# Altium PCB DUTBoard_NO_CAPS.PcbDoc (part 2 of 5)
Units mil, origin at the board's own origin, x right, y up, seen from the top; angles counter-clockwise.
Board outline 5475 x 5475 mil, 4 copper layers (Top Layer, Mid-Layer 1, Mid-Layer 2, Bottom Layer); 57 components, 471 nets, 1641 pads, 1070 vias.
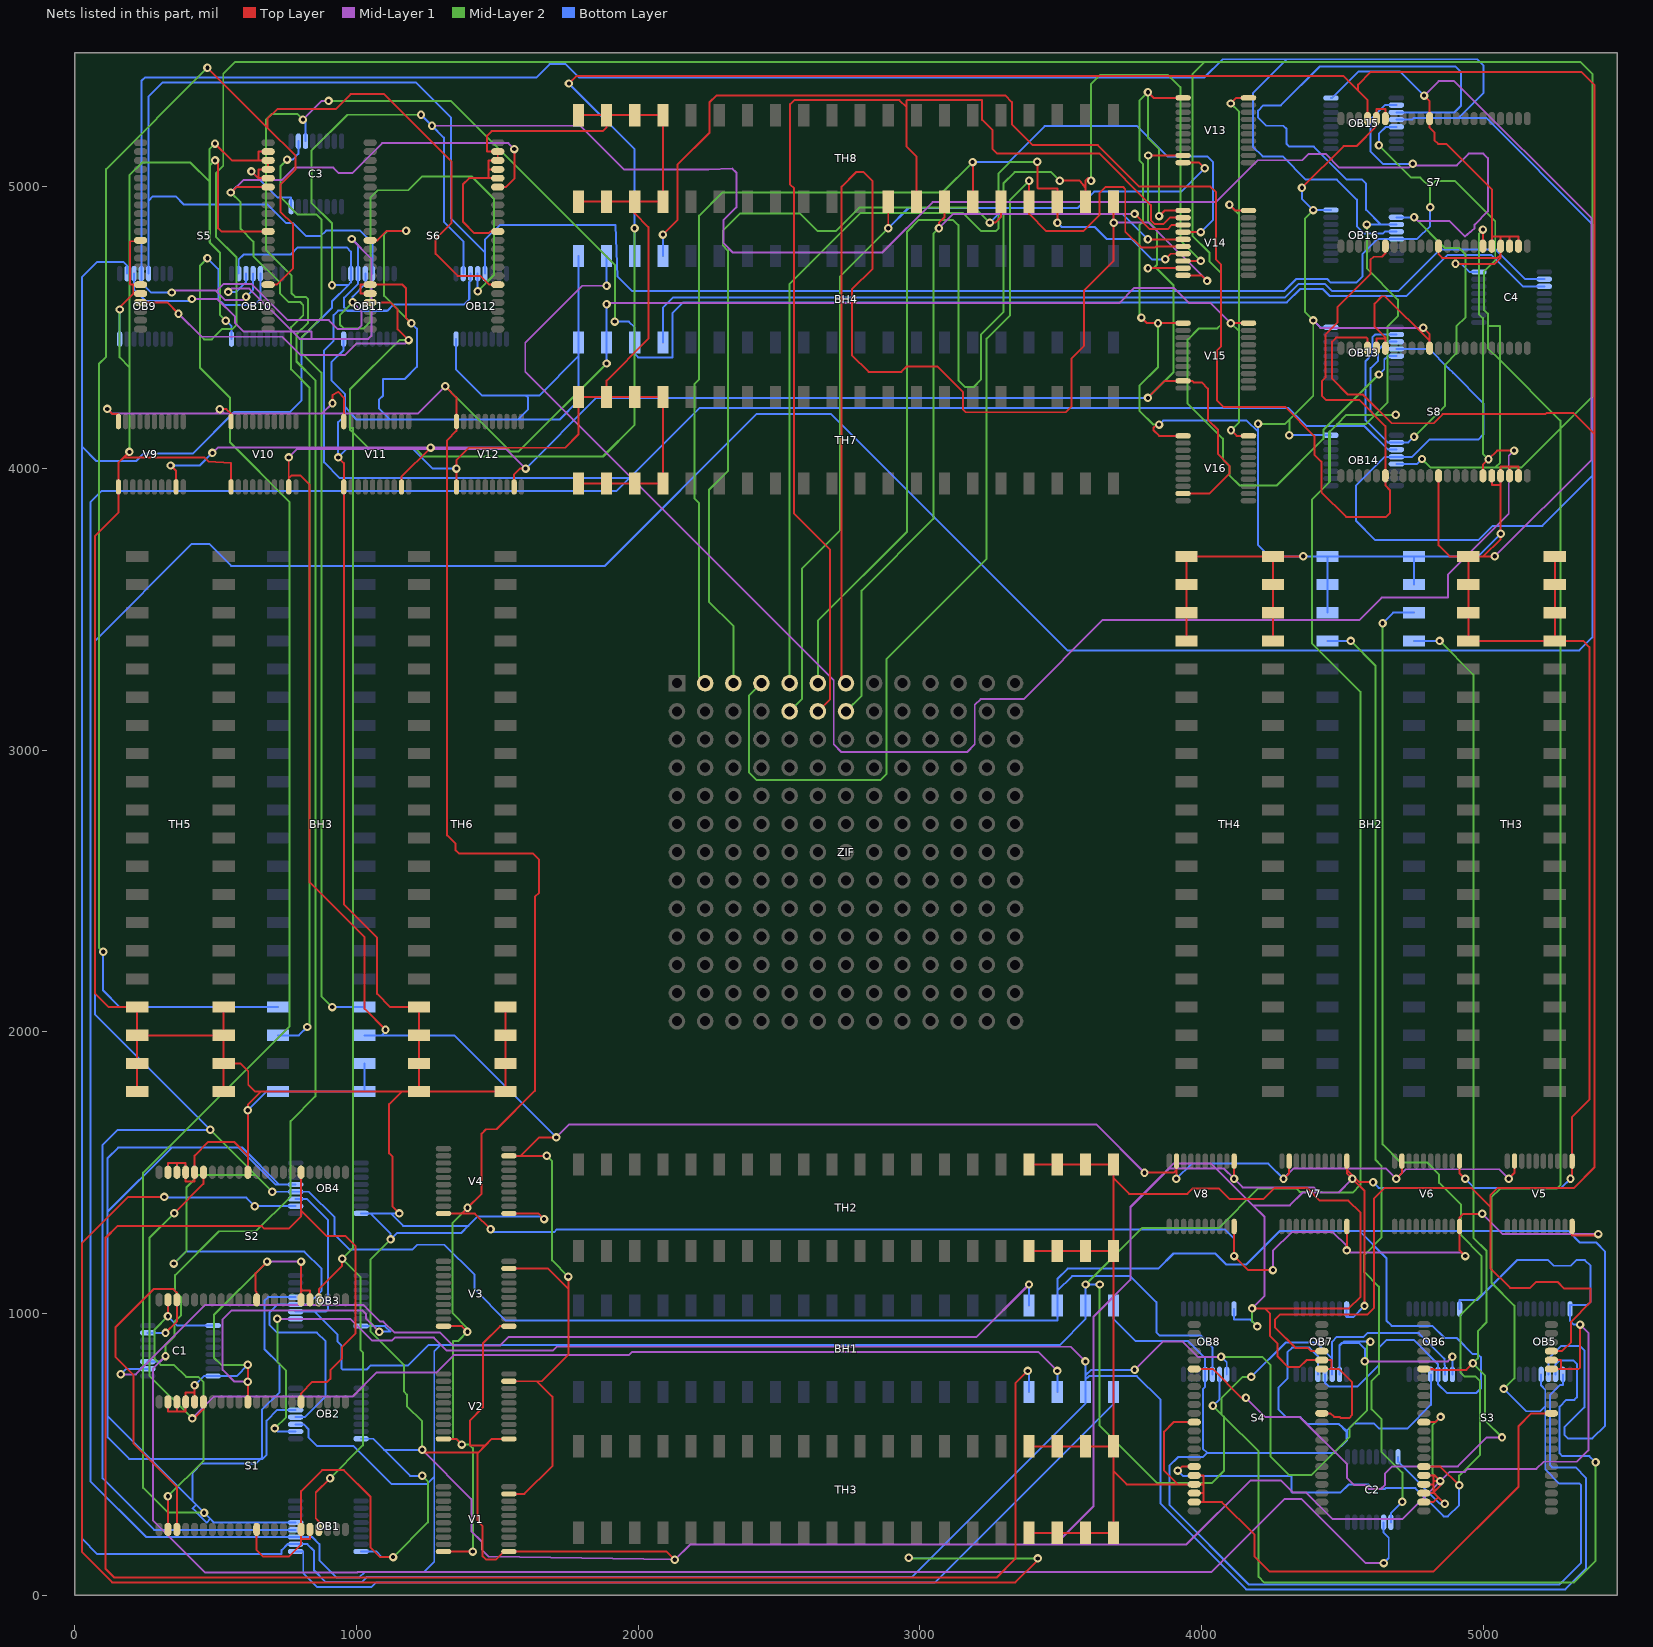
[diagram p4: the nets of this part, all layers, seen from the top]

## Via types
v1: diameter 30, hole 15, Top Layer to Bottom Layer, 1070 vias

## Nets (pads, with @x,y where several pads share a name; then routed paths per layer and width w, separated by ;. In a path a pad name is that pad's centre, name@x,y a point inside that pad or via, vN(x,y) a via of type N, cw(c..) or ccw(c..) an arc to the next point about the centre after c; other vN are vias at no path point) (continued)
ADDRD_B10: C1.ADDR10 S1.ADDR10 S2.ADDR10 | length 1309.8
  Top Layer w7: v1(322,931) 362.28,971.28 S2.ADDR10@362.28,1048.62 362.28,1073.72 349,1087 281,1087 144.36,950.36 144.36,846.2 209,781.56 209,538.28 362.28,385 S1.ADDR10@362.28,233.62
  Bottom Layer w7: C1.ADDR10@258.86,931.48 321.52,931.48 v1(322,931)
ADDRD_B11: C1.ADDR11 S1.ADDR11 S2.ADDR11 | length 1185.7
  Top Layer w7: S1.ADDR11@330.79,233.62 v1(330.79,351) ; v1(330.79,990) S2.ADDR11@330.79,1048.62
  Mid-Layer 2 w7: v1(330.79,351) 457,477.21 457,755.65 437.65,775 395,775 352.03,817.97 305.03,817.97 283,840 283,942.21 v1(330.79,990)
  Bottom Layer w7: v1(330.79,990) 363.72,957.07 C1.ADDR11@491.14,957.07
CLK_1: BH4.17 C4.~CLK | length 3401.8
  Bottom Layer w7: BH4.17@2087.5,4446.46 2087.5,4570.43 2124.07,4607 4296,4607 4343,4654 4438,4654 4463,4629 4697.5,4629 4844.5,4776 5044,4776 5148.52,4671.48 C4.~CLK@5216.14,4671.48
CLK_2: BH3.17 C3.~CLK | length 3399.8
  Mid-Layer 2 w7: v1(753.52,5096) 730.61,5073.09 730.61,4961.61 791.65,4900.58 858.34,4900.58 874.96,4883.96 874.96,4534.97 804,4464.01 804,4410.5 874.96,4339.54 874.96,2126.54 v1(914,2087.5)
  Bottom Layer w7: v1(753.52,5096) 773.52,5096 793.52,5116 C3.~CLK@793.52,5161.14 ; v1(914,2087.5) BH3.17@1028.54,2087.5
CLK_3: BH2.17 C2.~CLK | length 3376.2
  Mid-Layer 2 w7: v1(4529.5,3387.5) 4617,3300 4617,1545 4638,1524 4638,1268.95 4576.38,1207.33 4576.38,1147.69 4629,1095.07 4629,786 4603.5,760.5 4603.5,659.5 4639,624 4639,508 4712,435 v1(4712,332)
  Bottom Layer w7: BH2.17@4446.46,3387.5 v1(4529.5,3387.5) ; C2.~CLK@4671.48,258.86 4671.48,291.48 v1(4712,332)
CLK_4: BH1.17 C1.~CLK | length 3653.2
  Mid-Layer 1 w7: v1(163.43,784) 216.5,784 463.5,1031 1024.53,1031 1084.03,971.5 1095.5,971.5 1135.07,931.93 1296.48,931.93 1341.41,887 1510.5,887 1540.5,917 3201,917 v1(3387,1103)
  Bottom Layer w7: v1(163.43,784) 182.96,803.52 C1.~CLK@258.86,803.52 ; v1(3387,1103) 3387.5,1102.5 BH1.17@3387.5,1028.54
CLR_COUNTER_W_U_COUNTER_WRP1: BH4.18 C1.CLR C2.CLR C3.CLR C4.CLR | length 15835.3
  Mid-Layer 1 w7: v1(322,849) 278,805 278,265 463,80 1002.14,80 1005.14,83 4035.5,83 4294.86,342.36 4354.02,342.36 4582.39,114 v1(4645.89,114) ; v1(809.93,5238) 875.93,5304 v1(901,5304)
  Mid-Layer 2 w7: v1(322,849) 322,887 354.05,919.05 354.05,970.5 376.22,992.67 376.22,1059.22 356,1079.45 356,1136 512,1292 643.16,1292 766,1414.84 766,1683.08 854,1771.08 854,4312.1 787,4379.1 787,4476.07 828,4517.07 828,4600.5 820,4608.5 782,4608.5 770,4620.5 770,4683.7 678,4775.7 678,5236.5 700,5258.5 789.43,5258.5 v1(809.93,5238) ; v1(901,5304) 1335,5304 1917,4722 v1(1917,4521)
  Bottom Layer w7: C1.CLR@258.86,829.11 302.11,829.11 v1(322,849) ; v1(809.93,5238) 819.11,5228.81 C3.CLR@819.11,5161.14 ; v1(1917,4521) 1966.5,4521 1987.5,4500 BH4.18@1987.5,4446.46 1987.5,4406.08 2000,4393.58 2120.69,4393.58 2121,4393.9 2121,4549.82 2160.18,4589 4302.5,4589 4350,4636.5 4430,4636.5 4455.5,4611 4726.5,4611 4873.5,4758 5028,4758 5140.11,4645.89 C4.CLR@5216.14,4645.89 ; v1(4645.89,114) 4664,132.11 4664,204 4645.89,222.11 C2.CLR@4645.89,258.86
EN: BH4.19 V1.EN V2.EN V3.EN V4.EN V5.EN V6.EN V7.EN V8.EN V9.EN V10.EN V11.EN V12.EN V13.EN V14.EN V15.EN V16.EN | length 16402
  Top Layer w7: v1(115,4211) 133.15,4192.85 154.84,4192.85 V9.EN@154.84,4166.14 ; v1(515,4210) 538.34,4210 554.84,4193.5 V10.EN@554.84,4166.14 ; v1(914.84,4231.02) 914.84,4260 934.84,4271.02 954.84,4251.02 V11.EN@954.84,4166.14 ; V1.EN@1308.86,154.84 v1(1413,154.84) ; V2.EN@1308.86,554.84 1353.74,554.84 v1(1373.74,534.84) ; V3.EN@1308.86,954.84 1373.74,954.84 v1(1393.74,934.84) ; V4.EN@1308.86,1354.84 1373.84,1354.84 ; v1(1315,4291) 1354.84,4251.16 V12.EN@1354.84,4166.14 1354.84,4132.92 1321.5,4099.58 1321.5,2697.5 1352,2667 1352,2644 1363,2633 1625,2633 1648,2610 1648,2494 1633,2479 1633,1790 1497,1654 1459.61,1654 1444,1638.39 1444,1425 v1(1394,1375) 1373.84,1354.84 ; v1(1476,1299) 1420.16,1354.84 1373.84,1354.84 ; v1(4098.42,4935.16) 4118.42,4915.16 V14.EN@4166.14,4915.16 ; v1(4103,5295) 4123.16,5315.16 V13.EN@4166.14,5315.16 ; v1(4103.58,4515.16) V15.EN@4166.14,4515.16 ; v1(4104,4135) 4123.84,4115.16 V16.EN@4166.14,4115.16 ; V8.EN@4115.16,1308.86 v1(4115.16,1203.98) 4165.14,1154 v1(4253,1154) ; v1(4515.16,1223.98) V7.EN@4515.16,1308.86 ; v1(4935.16,1204) 4915.16,1224 V6.EN@4915.16,1308.86 4915.16,1340 4929.16,1354 v1(4996.16,1354) ; V5.EN@5315.16,1308.86 5315.16,1276.84 5402.84,1276.84 v1(5408,1282)
  Mid-Layer 1 w7: v1(115,4211) 131,4195 500,4195 ; v1(914.84,4231.02) 878.82,4195 ; v1(1315,4291) 1219,4195 878.82,4195 ; v1(1887.5,4582) 1892,4586.5 3706.72,4586.5 3760.88,4640.66 3901.5,4640.66 3955.66,4586.5 4032.24,4586.5 v1(4103.58,4515.16) ; v1(4253,1154) 4253,1222 4320,1289 4466,1289 4515.16,1239.84 v1(4515.16,1223.98) 4522.14,1217 4922.16,1217 v1(4935.16,1204) ; v1(4996.16,1354) 5068.16,1282 v1(5408,1282) ; 500,4195 530,4195 ; 500,4195 v1(515,4210) 530,4195 ; 530,4195 878.82,4195
  Mid-Layer 2 w7: v1(1315,4291) 1547,4059 1574.5,4059 v1(1887.5,4372) ; v1(1394,1375) 1341,1322 1341,1001 1393.74,948.26 v1(1393.74,934.84) 1362,903.1 1342,903.1 1342,554.84 1353.74,554.84 v1(1373.74,534.84) 1400,534.84 1413,521.84 v1(1413,154.84) ; v1(4098.42,4935.16) 4133,4900.58 ; v1(4103,5295) 4133,5265 4133,4900.58 ; v1(4103.58,4515.16) 4133,4485.74 ; v1(4104,4135) 4133,4164 4133,4485.74 ; 4133,4485.74 4133,4900.58
  Bottom Layer w7: v1(1476,1299) 1486,1289 1701.5,1289 1711.5,1299 4081.17,1299 4115.16,1265.01 v1(4115.16,1203.98) ; v1(1887.5,4372) BH4.19@1887.5,4446.46 v1(1887.5,4582)
FPGA_Q: BH1.21 OB1.Q | length 3312.2
  Bottom Layer w7: OB1.Q@783.86,155.43 811,155.43 811,78.5 860.5,29 1053.14,29 1070.14,46 3053.5,46 3687.5,680 BH1.21@3687.5,721.46
FPGA_SHCP: BH1.19 OB1.SHCP OB2.SHCP OB3.SHCP OB4.SHCP OB5.SHCP OB6.SHCP OB7.SHCP OB8.SHCP OB9.SHCP OB10.SHCP OB11.SHCP OB12.SHCP OB13.SHCP OB14.SHCP OB15.SHCP OB16.SHCP | length 34880.7
  Mid-Layer 1 w7: v1(416,4601) 505.46,4601 569,4537.46 569,4515 599,4485 773,4485 ; v1(545,4626) 557,4638 620,4638 773,4485 ; v1(983,4814) 1053,4744 1053,4470.5 1042.04,4459.54 841,4459.54 ; 773,4485 798.46,4459.54 841,4459.54 ; 773,4485 841,4485 841,4459.54
  Mid-Layer 2 w7: v1(3588,1103) 3788,1303 4060,1303 4201,1444 4336,1444 4348,1432 ; v1(3638,1103) 3638,602 3841,399 4037,399 4079,441 4079,628.24 4079,633.61 ; v1(4040,672.61) 4070,642.61 ; v1(4176,775) 4145.78,775 4070,699.22 4070,642.61 ; v1(4586,4865) 4586,4709.5 4696.5,4599 4696.5,4540.53 4659,4503.03 4659,4233.19 4615.64,4189.82 ; v1(4688.5,4189.82) 4615.64,4189.82 ; v1(5398,472) 5398,123 5320,45 4222,45 4202,65 4202,510.61 4079,633.61 ; 4070,642.61 4079,633.61 ; 4348,1432 4349,1431 4424.5,1431 4426.5,1429 4429.5,1429 ; 4348,1432 4426.5,1432 4429.5,1429 ; 4392.5,3377.5 4392.5,3890.5 ; 4392.5,3377.5 4563.5,3206.5 ; 4392.5,3377.5 4392,3378 4392,3890 4392.5,3890.5 ; 4392.5,3890.5 4452,3950 ; 4429.5,1429 4536,1429 4563.5,1456.5 ; 4452,3950 4455.29,3953.29 4455.29,4131.85 4452,4128.56 ; 4452,3950 4452,4128.56 ; 4452,4128.56 4480.44,4157 ; 4480.44,4157 4582.81,4157 4615.64,4189.82 ; 4480.44,4157 4513.26,4189.82 4615.64,4189.82 ; 4563.5,1456.5 4564,1457 4564,3206 4563.5,3206.5 ; 4563.5,1456.5 4563.5,3206.5
  Bottom Layer w7: OB9.SHCP@210.61,4691.14 210.61,4634.39 251,4594 409,4594 v1(416,4601) ; v1(545,4626) 573.61,4626 607.61,4660 OB10.SHCP@607.61,4691.14 ; OB2.SHCP@783.86,606.61 812.39,606.61 829,590 829,560 860,529 990,529 1124,395 1251,395 1276,420 ; OB3.SHCP@783.86,1006.61 851,1006.61 ; OB4.SHCP@783.86,1406.61 823.39,1406.61 898.93,1331.07 898.93,1015.2 890.34,1006.61 851,1006.61 ; v1(983,4814) 1005.61,4791.39 OB11.SHCP@1005.61,4691.14 1005.61,4655.61 956,4606 956,4571 967,4560 ; OB12.SHCP@1404.61,4691.14 1404.61,4665.61 1401,4662 ; v1(3638,1103) v1(3588,1103) ; v1(4040,672.61) 4063.39,696 OB8.SHCP@4063.39,783.86 ; v1(4176,775) 4298,897 4406.39,897 4463.39,840 ; OB7.SHCP@4463.39,783.86 4463.39,840 ; v1(4586,4865) 4586.39,4865.39 4635.61,4865.39 ; v1(4688.5,4189.82) 4613.18,4189.82 4600,4203 4600,4355.5 4626,4381.5 4626,4420 4655.39,4449.39 OB13.SHCP@4691.14,4449.39 ; OB14.SHCP@4691.14,4066.39 4661.55,4066.39 4577.93,4150 4373,4150 4309,4214 2217,4214 1968,3965 ; OB16.SHCP@4691.14,4865.39 4635.61,4865.39 ; OB15.SHCP@4691.14,5263.39 4897.37,5263.39 4920,5286.01 4920,5407.5 4900.5,5427 4420,5427 4281,5288 4218.5,5288 4200,5269.5 4200,5244.71 4228.71,5216 4289.71,5216 4301,5204.71 4301,5152 4311,5142 4398,5142 4515,5025 4569.5,5025 4584,5010.5 4584,4917 4635.61,4865.39 ; OB6.SHCP@4864.39,783.86 4864.39,815.01 4861.48,817.92 4861.48,839.52 4771,930 4588,930 4575,917 4480,917 4463.39,900.39 4463.39,840 ; OB5.SHCP@5256.39,783.86 5256.39,820 5269.39,833 5320,833 5332,821 5332,702.66 5322.98,693.63 5294.63,693.63 5270.52,669.52 5270.52,503.48 5280,494 5376,494 v1(5398,472) ; 851,1006.61 932,925.61 932,901.12 947.5,885.62 947.5,804 950.5,801 1035.5,801 1050.5,816 1183,816 1255,888 1298,888 ; 967,4560 968,4559 1109,4559 1110,4560 ; 967,4560 1110,4560 ; 967,4560 935.11,4560 918.5,4543.39 918.5,4452.5 885,4419 885,4021 941,3965 1968,3965 ; 1110,4560 1131,4581 1381,4581 1400,4600 ; 1276,420 1276,866 1298,888 ; 1276,420 1276,119 1239,82 1029,82 1010.5,63.5 928.14,63.5 868,123.63 868,181 842.39,206.61 OB1.SHCP@783.86,206.61 253.39,206.61 55,405 55,3880 95,3920 1923,3920 1968,3965 ; 1298,888 3495.5,888 3587.5,980 BH1.19@3587.5,1028.54 ; 1400,4600 1400,4661 1401,4662 ; 1400,4600 1401,4601 1401,4662 ; BH1.19@3587.5,1028.54 3587.5,1102.5 v1(3588,1103) ; BH1.19@3587.5,1028.54 v1(3588,1103)
FPGA_STCP: BH1.18 OB1.STCP OB2.STCP OB3.STCP OB4.STCP OB5.STCP OB6.STCP OB7.STCP OB8.STCP OB9.STCP OB10.STCP OB11.STCP OB12.STCP OB13.STCP OB14.STCP OB15.STCP OB16.STCP | length 36095.1
  Mid-Layer 1 w7: v1(344,4624) v1@351,4631 ; v1(608,4609.13) 595.86,4597 533.5,4597 501.75,4628.75 ; v1(986,4589.13) 1018.5,4556.63 1018.5,4507.75 1005.04,4494.29 933.71,4494.29 902.21,4525.79 756.25,4525.79 627.04,4655 528,4655 501.75,4628.75 ; v1@351,4631 501.75,4628.75 ; v1@351,4631 499.5,4631 501.75,4628.75
  Mid-Layer 2 w7: v1(351,1177) 397,1223 397,1449 440,1492 641,1492 ; v1(481,1652) 641,1492 ; v1(701,1432) 641,1492 ; v1(986,4589.13) 941,4544.13 941,4510.5 954.5,4497 1026,4497 1049,4520 1049,4960 1076,4987 1184.22,4987 1232.22,5035 1410,5035 1488,4957 1488,4686.2 v1(1430.2,4628.41)
  Bottom Layer w7: v1(344,4624) 272,4624 236.2,4659.8 OB9.STCP@236.2,4691.14 236.2,5374.85 249.36,5388 1639,5388 1685.5,5434.5 1742.5,5434.5 1789,5388 4010,5388 4074,5452 4302,5452 ; v1(351,1177) 394,1220 815,1220 876,1159 876,1081 827.2,1032.2 OB3.STCP@783.86,1032.2 720,1032.2 690.48,1002.68 690.48,960 718.48,932 859.5,932 890.23,901.27 890.23,706.73 815.7,632.2 OB2.STCP@783.86,632.2 ; v1(608,4609.13) 633.2,4634.34 OB10.STCP@633.2,4691.14 ; v1(701,1432) 701.2,1432.2 OB4.STCP@783.86,1432.2 830.79,1432.2 922,1340.99 922,1280 974.5,1227.5 1199.5,1227.5 1216,1244 1312,1244 1419,1137 1419,1086 1530,975 3487.5,975 BH1.18@3487.5,1028.54 3487.5,1080 ; OB1.STCP@783.86,232.2 281.8,232.2 99,415 99,1599 152,1652 v1(481,1652) 72,2061 72,3388 416,3732 477,3732 555,3654 1882,3654 2421,4193 2684,4193 3523,3354 5341,3354 5387,3400 5387,3974 ; v1(986,4589.13) 986,4609.13 1031.2,4654.34 OB11.STCP@1031.2,4691.14 ; v1(1430.2,4628.41) OB12.STCP@1430.2,4691.14 ; OB8.STCP@4037.8,783.86 4037.8,880 3995.8,922 3850,922 3839,933 3839,1040 3746,1133 3540.5,1133 3487.5,1080 ; OB7.STCP@4437.8,783.86 4437.8,754.2 4451,741 4554,741 4629,816 4629,879 4656.25,906.25 4752.55,906.25 4838.8,820 OB6.STCP@4838.8,783.86 4838.8,749.2 4870,718 4975.5,718 4991.34,733.84 4991.34,844.79 4980,856.13 4962.87,856.13 4906,913 4862,913 4819,956 4674,956 4656,974 4656,1196 4559,1293 ; OB13.STCP@4691.14,4423.8 4807.2,4423.8 4875.5,4355.5 4875.5,4355.19 4892.19,4338.5 4892.5,4338.5 5000,4231 5000,4120.5 4981.5,4102 4808.2,4102 4747,4040.8 OB14.STCP@4691.14,4040.8 4649.41,4040.8 4548,3939.39 4548,3813 4615,3746 4982.72,3746 5032.72,3796 5209,3796 5387,3974 ; OB16.STCP@4691.14,4839.8 4650,4839.8 4644.2,4834 4576,4834 4551,4859 4551,4954 4480,5025 4370,5025 4288,5107 4216,5107 4182,5141 4182,5332 4302,5452 ; OB15.STCP@4691.14,5237.8 4746.8,5237.8 4753,5244 4912.49,5244 ; OB5.STCP@5230.8,783.86 5230.8,840 5274.8,884 5343,884 5358,869 5358,667 5287.52,596.52 5287.52,568.98 5299.5,557 5387,557 5432,602 5432,1220 5400,1252 5342,1252 5301,1293 4559,1293 ; 3487.5,1080 3487.5,1122.5 3524,1159 3846,1159 3900,1213 4048,1213 4087,1174 4159,1174 4278,1293 4559,1293 ; 4302,5452 4978,5452 5000,5430 5000,5331.51 4912.49,5244 ; 4912.49,5244 5010,5244 5387,4867 5387,3974
FPGA_~CS1: BH4.24 S7.~CS S8.~CS | length 5483.1
  Top Layer w7: v1(2087.5,4829.5) 2139,4881 2139,5077 2253,5191 2253,5299 2278,5324 3302,5324 3326,5300 3326,5221 3400,5147 3631.54,5147 3778.54,5000 4031,5000 4050,4981 4050,4742 4069,4723 4069,4433 4054,4418 4054,4241 4077,4218 4296,4218 4400,4114 4400,4048.8 4424.8,4024 4424.8,3915.7 4512.5,3828 4655,3828 4668,3841 4668,3923 4651.77,3939.23 S8.~CS@4651.77,3973.62 4651.77,4149.98 4558.75,4243 4440.81,4243 4427,4256.81 4427,4309.5 4439,4321.5 4439,4474.59 4481.5,4517.09 4481.5,4571.5 4599,4689 4599,4740 4610,4751 4640,4751 4651.77,4762.77 S7.~CS@4651.77,4788.62
  Bottom Layer w7: BH4.24@2087.5,4753.54 v1(2087.5,4829.5)
FPGA_~CS2: BH3.24 S5.~CS S6.~CS | length 6517.1
  Top Layer w7: v1(471,5422) 684,5209 ; S5.~CS@686.38,4651.77 716.34,4651.77 775,4710.43 775,4866 730,4911 730,5007 784,5061 784,5109 684,5209 ; S6.~CS@1501.38,4651.77 1471.27,4651.77 1440.04,4683 1359,4683 1281,4761 1281,4814.91 1336.5,4870.41 1336.5,5089.5 1098,5328 979,5328 926,5275 719,5275 684,5240 684,5209
  Mid-Layer 2 w7: v1(101,2284) 86,2299 86,4371 111,4396 111,5062 v1(471,5422)
  Bottom Layer w7: v1(101,2284) 101,2146.5 160,2087.5 BH3.24@721.46,2087.5
FPGA_~CS3: BH2.24 S3.~CS S4.~CS | length 4669.3
  Top Layer w7: S4.~CS@3973.62,803.23 4038.7,803.23 4140.93,701 v1(4157,701) ; v1(4962.84,823.23) 4939.61,800 4825.47,800 ; 4825.47,800 S3.~CS@4788.62,803.23 4822.24,803.23 4825.47,800
  Mid-Layer 1 w7: v1(4157,701) 4226,632 4349,632 4516,465 4516,416 4540,392 4578,392 4593,377 4636.5,377 4650,390.5 4650,430.96 4676.04,457 4909.47,457 5012.47,560 v1(5066,560)
  Mid-Layer 2 w7: v1(4844.5,3387.5) 4964,3268 4964,1269.35 5010.93,1222.42 5010.93,968.24 4980,937.31 4980,840.39 v1(4962.84,823.23) 5005.42,780.65 5005.42,620.58 v1(5066,560)
  Bottom Layer w7: BH2.24@4753.54,3387.5 v1(4844.5,3387.5)
FPGA_~CS4: BH1.24 S1.~CS S2.~CS | length 7004.8
  Top Layer w7: S1.~CS@803.23,686.38 803.23,716.89 843.43,757.09 895.86,757.09 907,768.23 907,798.37 948,839.37 948,880.5 996.29,928.79 996.29,1240 960.77,1275.52 893.09,1275.52 803.23,1365.39 ; S2.~CS@803.23,1501.38 803.23,1365.39 ; v1(3383,796) 3339,752 3339,129 3273,63 140,63 109,94 109,1268 151,1310 664.24,1310 672.74,1301.5 760,1301.5 803.23,1344.73 803.23,1365.39
  Bottom Layer w7: v1(3383,796) 3387.5,791.5 BH1.24@3387.5,721.46
FPGA_~MR: BH1.22 OB1.~MR OB2.~MR OB3.~MR OB4.~MR OB5.~MR OB6.~MR OB7.~MR OB8.~MR OB9.~MR OB10.~MR OB11.~MR OB12.~MR OB13.~MR OB14.~MR OB15.~MR OB16.~MR | length 34524.7
  Top Layer w7: v1(317.3,1413.7) 189.3,1413.7 26,1250.41 26,152.96 132.96,46 3339,46 v1@3421,128
  Mid-Layer 1 w7: v1(718.98,981.02) 977.86,981.02 1055.38,903.5 1125.5,903.5 1136,914 1274.61,914 1319.11,869.5 1698.23,869.5 1710.73,882 3535.5,882 v1(3587.5,830) ; v1(1268,5216) 1794,5216 1949,5061 2250,5061 2334,5064 2348,5050 2348,4926 2302,4880 2302,4800 2336,4766 2866,4766 3045,4945 4050.5,4945 4199,5093.5 4357.5,5093.5 4380,5116 4440.5,5116 4489,5067.5 4735.5,5067.5 v1(4749,5081) ; v1(3762,800) 3861.95,899.95 3933.05,899.95 3986.58,846.42 v1(4068.98,846.42) ; v1(4579,830.5) 4579.5,830 4873.56,830 v1(4889.98,846.42) ; v1@4749,5075 4905.86,5075 4947.62,5116.76 5000.24,5116.76 5015.7,5101.3 5015.7,4911.7 4969,4865 4969,4852 4934,4823 4879,4878 4767,4878 v1(4754,4891)
  Mid-Layer 2 w7: v1(710,592.05) 750,632.05 750,796.98 718.98,828 v1(718.98,981.02) ; v1(913,4650.08) 913,4870.23 840,4943.23 840,5127 968,5255 v1(1229,5255) ; v1@2963,130 2963.7,130.7 v1(3418.3,130.7) ; v1(4068.98,846.42) 4069.39,846 4214.96,846 4245,815.96 4245,492 4311,426 4389,426 4525.1,562.1 4525.1,594 4586.5,655.4 4586.5,887.5 v1(4599,900) ; v1(4754,4112) 4864,4222 4864,4368 4904,4408 4904,4504 4937,4537 4937,4759 4914,4782 4863,4782 v1(4754,4891)
  Bottom Layer w7: OB9.~MR@185.02,4691.14 185.02,4720 172.02,4733 79,4733 26,4680 26,4076 ; v1@320,1411 609,1411 v1(638.98,1381.02) OB4.~MR@783.86,1381.02 ; OB10.~MR@582.02,4691.14 582.02,4741.8 599.23,4759 767,4759 792,4784 965.02,4784 980.02,4769 OB11.~MR@980.02,4691.14 980.02,4660 970.11,4650.08 ; v1(710,592.05) 721.02,581.02 OB2.~MR@783.86,581.02 ; v1(718.98,981.02) OB3.~MR@783.86,981.02 ; v1(913,4650.08) 970.11,4650.08 ; v1(1229,5255) v1(1268,5216) 1310,5174 1310,4875.02 1379.02,4806 OB12.~MR@1379.02,4691.14 ; v1(2960.3,132.7) 2961.75,131.25 3038.75,131.25 ; v1(3587.5,830) 3587.5,780 ; v1(3762,800) 3607.5,800 3587.5,780 ; v1(4068.98,846.42) 4088.98,826.42 OB8.~MR@4088.98,783.86 ; OB7.~MR@4488.98,783.86 4488.98,884.48 ; v1(4579,830.5) 4579,875 4558,896 4500.5,896 ; v1(4599,900) 4504.5,900 4500.5,896 ; OB13.~MR@4691.14,4474.98 4615.98,4474.98 4606,4465 4606,4405 4582,4381 4582,4169.98 4660,4091.98 OB14.~MR@4691.14,4091.98 4733.98,4091.98 v1(4754,4112) ; OB16.~MR@4691.14,4890.98 v1(4754,4891) ; OB15.~MR@4691.14,5288.98 4649.98,5288.98 4599,5238 4599,5125 4643,5081 v1(4749,5081) v1@4749,5075 ; OB6.~MR@4889.98,783.86 v1(4889.98,846.42) ; OB5.~MR@5281.98,783.86 5281.98,746.98 5271.98,746.98 5236.52,711.52 5236.52,461.46 5243.98,454 5327,454 5364,417 5364,94 5291,21 4158,21 3854,325 3854,694 3770,778 3600,778 3587.5,765.5 ; 26,4076 26,200 80,146 734,146 734,160 755.02,181.02 OB1.~MR@783.86,181.02 825.26,181.02 849.21,157.08 849.21,88.92 891.63,46.5 1018.13,46.5 1035.63,64 2971.5,64 3038.75,131.25 ; 26,4076 76,4026 218,4026 245,4053 420,4053 567,4200 764.5,4200 804.5,4240 804.5,4461 913,4569.5 913,4592.98 970.11,4650.08 ; 3038.75,131.25 3587.5,680 BH1.22@3587.5,721.46 3587.5,765.5 ; 3587.5,765.5 3587.5,780 ; 4488.98,884.48 4500.5,896 ; 4488.98,884.48 4488.98,887.48 4497.5,896 4500.5,896
FPGA_~OE: BH4.23 S1.~OE S2.~OE S3.~OE S4.~OE S5.~OE S6.~OE S7.~OE S8.~OE | length 20272.7
  Top Layer w7: S5.~OE@233.62,4588.78 328.22,4588.78 v1(368.22,4548.78) ; S1.~OE@866.22,233.62 866.22,261.65 855.37,272.5 855.37,364.67 v1(906.22,415.53) ; S2.~OE@866.22,1048.62 866.22,1086.39 949.32,1169.49 v1(949.32,1194.02) ; S6.~OE@1048.62,4588.78 1120,4588.78 1146.16,4562.62 1146.16,4493.54 v1(1184.69,4455) ; v1(1754,5366) 1780,5392 4503.78,5392 4555,5340.78 ; S4.~OE@4426.38,866.22 4389,866.22 4377.22,878 4333,878 4261,950 4261,979 4279,997 4589,997 4612,1020 4612,1409 4648,1445 4959,1445 5024.66,1379.34 ; S8.~OE@4588.78,4426.38 4588.78,4460 4584.78,4464 4477,4464 4463,4450 4463,4318 4519,4262 4572,4262 4674,4160 4823,4160 4855,4192 5219.08,4192 5223.08,4196 5320,4196 5395,4121 ; S7.~OE@4588.78,5241.38 4588.78,5307 4555,5340.78 ; S3.~OE@5241.38,866.22 5278.5,866.22 5311,898.72 5311,971.5 5379.5,1040 5379.5,1088.5 5286.5,1088.5 5263,1112 5187,1112 5166,1091 5095,1091 5024.66,1161.34 5024.66,1379.34 ; 4555,5340.78 4555,5362 4600,5407 5347,5407 5395,5359 5395,4121 ; 5024.66,1379.34 5024.66,1420 5049.66,1445 5320,1445 5395,1520 5395,4121
  Mid-Layer 1 w7: v1(368.22,4548.78) 450,4467 737.15,4467 802.65,4401.5 958.76,4401.5 999.8,4442.54 1172.23,4442.54 v1(1184.69,4455)
  Mid-Layer 2 w7: v1(906.22,415.53) 1022.63,531.94 1022.63,861.88 1015,869.51 1015,1128.34 v1(949.32,1194.02) 988,1232.69 988,4126 ; v1(1184.69,4455) 1152,4455 977,4280 977,4143.48 ; v1(1987,4852) 1987,4154 1875,4042 1237,4042 1206,4073 1041,4073 988,4126 ; 977,4143.48 977,4137 988,4126 ; 977,4143.48 988,4143.48 988,4126
  Bottom Layer w7: v1(1754,5366) 1987.5,5132.5 v1@1987.5,4851.5 ; v1(1987,4852) v1@1987.5,4851.5 ; BH4.23@1987.5,4753.54 v1@1987.5,4851.5
FPGA_~PL: BH1.20 OB1.~PL OB2.~PL OB3.~PL OB4.~PL OB5.~PL OB6.~PL OB7.~PL OB8.~PL OB9.~PL OB10.~PL OB11.~PL OB12.~PL OB13.~PL OB14.~PL OB15.~PL OB16.~PL | length 40364.2
  Mid-Layer 2 w7: v1(459,293) 331,293 243,381 243,1500 763,2020 763,3880 551,4092 551,4251 444.5,4357.5 444.5,4473 ; v1(471,4746) 444.5,4719.5 444.5,4473 ; v1(4629,4333) 4432,4136 4432,4104.61 4266.39,3939 4135,3939 4098.5,3975.5 4098.5,4008.81 4075,4032.31 4075,4105.5 3950.5,4230 3950.5,4457 3990.5,4497 4056,4497 4069,4510 4069,4693 4027,4735 4027,4766 3967,4826 3967,5399 4011,5443 ; v1(4629,5147) 4744,5032 4776.5,5032 4811,4997.5 ; v1(4782,4033) 4812,4003 5042,4003 ; v1(4811,4927) 4811,4997.5 ; v1(5072.5,732.5) 5110,770 5110,1027.93 5027.93,1110 5027.93,1411.93 5059,1443 5260,1443 5273,1456 5273,4140 ; 444.5,4473 459.5,4458 487,4458 524,4495 560,4495 573.5,4508.5 573.5,4750.12 501.16,4822.46 501.16,5048.15 527.06,5074.05 527.06,5401.06 569,5443 4011,5443 ; 4011,5443 5344,5443 5387,5400 5387,4254 5273,4140 ; 4811,4997.5 4811,5000 4831,5020 4899,5020 5042,4877 5042,4739 5001.5,4698.5 5001.5,4563.5 5016,4549 5016,4506 ; 5016,4506 5016,4426.23 5059,4383.23 ; 5016,4506 5059,4506 5059,4383.23 ; 5042,4003 5136,4003 5273,4140 ; 5042,4003 5059,4020 5059,4383.23 ; 5059,4383.23 5273,4169.23 5273,4140
  Bottom Layer w7: OB9.~PL@261.8,4691.14 261.8,4950 ; v1(471,4746) 510,4707 510,4600 530,4580 638.8,4580 658.8,4600 OB10.~PL@658.8,4691.14 ; OB1.~PL@783.86,257.8 494.2,257.8 481.2,270.8 ; OB2.~PL@783.86,657.8 719.3,657.8 681,619.5 681,498.5 666.5,484 660,484 ; OB3.~PL@783.86,1057.8 686.27,1057.8 673,1044.52 673,874 727,820 727,721 664,658 664,488 660,484 ; OB4.~PL@783.86,1457.8 725.8,1457.8 ; OB11.~PL@1056.8,4691.14 1056.8,4800 1012.8,4844 892,4844 872,4824 821,4824 775,4870 750.96,4870 683.96,4937 386,4937 358,4965 276.8,4965 261.8,4950 ; OB12.~PL@1455.8,4691.14 1455.8,4766.37 ; BH1.20@3687.5,1028.54 3687.5,980 3764.5,903 3950.04,903 4012.2,840.84 OB8.~PL@4012.2,783.86 4012.2,739.2 4004,731 4004,520 4019,505 ; OB7.~PL@4412.2,783.86 4412.2,848.86 4382.06,879 4321,879 4304,862 4304,769 4272,737 4272,660 4300,632 4350,632 4374,608 4486,608 ; v1(4629,4333) 4648,4352 4648,4386.2 4660,4398.2 OB13.~PL@4691.14,4398.2 ; v1(4629,5147) 4629,5187 4654.2,5212.2 OB15.~PL@4691.14,5212.2 ; OB14.~PL@4691.14,4015.2 4764.2,4015.2 v1(4782,4033) ; v1(4811,4927) 4811,4860 4765.2,4814.2 OB16.~PL@4691.14,4814.2 4624.2,4814.2 4571,4761 4571,4681 4549,4659 4458,4659 4445,4672 4336,4672 4294,4630 1977,4630 1927,4680 1918.5,4863.5 1508.5,4863.5 1455.8,4810.8 1455.8,4766.37 ; OB6.~PL@4813.2,783.86 4813.2,675.62 4729.08,591.5 4630,591.5 4612.5,609 4540,609 4515,584 ; v1(5072.5,732.5) 5152,653 5202.52,653 5219.52,670 ; OB5.~PL@5205.2,783.86 5205.2,744.48 5219.52,730.16 5219.52,670 ; 117,635 268,484 ; 117,635 116,636 116,1361 117,1362 ; 117,635 117,1362 ; 117,635 117,560 193,484 268,484 ; 117,1362 344,1589 ; 117,1362 117,1552 154,1589 344,1589 ; 261.8,4950 261.8,5320 310.8,5369 1212,5369 1335,5246 1335,4887.16 1455.8,4766.37 ; 268,484 418,334 ; 268,484 660,484 ; 344,1589 345,1590 593.59,1590 725.8,1457.8 ; 344,1589 582,1589 713.2,1457.8 725.8,1457.8 ; 418,334 431,321 ; 418,334 418,435.32 450.49,467.81 643.81,467.81 660,484 ; 431,321 v1(459,293) 481.2,270.8 ; 431,321 418,308 446,280 468.2,257.8 481.2,270.8 ; 4019,505 4004,490 3916,490 3885,459 3885,321 4168,38 5269,38 5347,116 5347,391 5341.5,396.5 5269.5,396.5 5219.52,446.48 5219.52,670 ; 4019,505 4471,505 4514,548 ; 4486,608 4515,584 ; 4486,608 4514,580 4514,548 ; 4514,548 4515,549 4515,584
FPGA_~WE1: BH4.22 S7.~WE S8.~WE | length 6541.6
  Top Layer w7: S8.~WE@4998.23,3973.62 4998.23,4012.23 v1(5018,4032) 5049,4063 v1(5109,4063) ; S7.~WE@4998.23,4788.62 v1(4998.23,4847.24)
  Mid-Layer 1 w7: v1(1887.5,4648) 1801,4648 1599,4446 1599,4342 2694,3247 2694,3020 2721,2993 3167.47,2993 3194.47,3020 3194.47,3160 3215.47,3181 3368,3181 3649.38,3462.38 4560.38,3462.38 4639,3541 4875,3541 4875,3624 5090,3839 5090,4044 v1(5109,4063)
  Mid-Layer 2 w7: v1(4998.23,4847.24) 4984,4833.02 4984,4547 4998,4533 4998,4052 v1(5018,4032)
  Bottom Layer w7: v1(1887.5,4648) BH4.22@1887.5,4753.54
FPGA_~WE2: BH3.23 S5.~WE S6.~WE | length 4675.7
  Top Layer w7: v1(554,4979) 573.23,4998.23 S5.~WE@686.38,4998.23 ; S6.~WE@1501.38,4998.23 1530,4998.23 1560,5028.23 v1(1560,5133)
  Mid-Layer 1 w7: v1(554,4979) 599,5024 736,5024 779,5067 918,5067 936,5049 986,5049 1091,5154 1539,5154 v1(1560,5133)
  Mid-Layer 2 w7: v1(554,4979) 589,4944 589,4849.91 634.2,4804.71 634.2,4753.3 729,4658.5 729,4620 758,4591 799.5,4591 811,4579.5 811,4544 768,4501 768,4351.09 834,4285.09 834,2026 v1(825,2017)
  Bottom Layer w7: BH3.23@721.46,1987.5 795.5,1987.5 v1(825,2017)
FPGA_~WE3: BH2.23 S3.~WE S4.~WE | length 4929.1
  Top Layer w7: v1(3915.23,442.5) 3929.5,456.77 S4.~WE@3973.62,456.77 ; S3.~WE@4788.62,456.77 4847.23,456.77 v1(4914,390)
  Mid-Layer 2 w7: v1(4642,3450) 4642,1600 4706,1536 4800,1536 4843,1493 4843,1464 4921,1386 4921,1277 4993,1205 4993,1068.91 4919,994.91 4919,790 4933,776 4972.42,776 4988.42,760 4988.42,498.96 4914,424.54 v1(4914,390)
  Bottom Layer w7: v1(3915.23,442.5) 3935.23,422.5 4316.5,422.5 4319,420 4319,366.45 4321.45,364 4492.43,364 4521.43,393 4591.74,393 4607.74,377 4649,377 4652.5,380.5 4758.5,380.5 4859,280 4874,280 4914,320 v1(4914,390) ; v1(4642,3450) 4679.5,3487.5 BH2.23@4753.54,3487.5
FPGA_~WE4: BH1.23 S1.~WE S2.~WE | length 4367
  Top Layer w7: v1(353,1356) 456.77,1459.77 S2.~WE@456.77,1501.38 ; v1(416.77,627.76) 424.53,627.76 456.77,660 S1.~WE@456.77,686.38
  Mid-Layer 1 w7: v1(416.77,627.76) 494.02,705 985.83,705 1072.13,791.3 1284.3,791.3 1345,852 1966.67,852 1978.67,864 3419.5,864 v1(3487.5,796)
  Mid-Layer 2 w7: v1(353,1356) 265,1268 265,779.53 v1(416.77,627.76)
  Bottom Layer w7: BH1.23@3487.5,721.46 v1(3487.5,796)
GLOBAL_HIGH_POWER: BH3.18 V1.VCC V2.VCC V3.VCC V4.VCC V5.VCC V6.VCC V7.VCC V8.VCC V9.VCC V10.VCC V11.VCC V12.VCC V13.VCC V14.VCC V15.VCC V16.VCC | length 16020.8
  Top Layer w7: v1(340,4010) 359.57,3990.43 V9.VCC@359.57,3933.86 ; V10.VCC@759.57,3933.86 759.57,3964.57 ; v1(759.57,4038.74) 759.57,3964.57 ; v1(1102.91,2007.5) 1029,2081.41 1029,2335 834,2530 834,3941 800,3975 770,3975 759.57,3964.57 ; V11.VCC@1159.57,3933.86 1159.57,3970.14 v1(1262.93,4073.5) ; V1.VCC@1541.14,359.57 1596,359.57 1695,458.57 1695,704.57 1640,759.57 ; V2.VCC@1541.14,759.57 1640,759.57 ; V3.VCC@1541.14,1159.57 1680,1159.57 1752,1087.57 ; V4.VCC@1541.14,1559.57 1583.57,1559.57 ; V12.VCC@1559.57,3933.86 1559.57,3978.57 1580,3999 v1(1600,3999) ; v1(1675,1560) 1674.57,1559.57 1583.57,1559.57 ; v1(1709,1625) 1649,1625 1583.57,1559.57 ; v1(1752,1131) 1752,1087.57 ; v1(3797,1500) 3900.43,1500 3910.43,1510 ; v1(3809,4250) 3869.43,4310.43 V15.VCC@3933.86,4310.43 3966,4310.43 3971.43,4305 4000,4305 4022,4283 4022,4172 4058,4136 4058,4050 4098.5,4009.5 4098.5,3981.5 4027.43,3910.43 V16.VCC@3933.86,3910.43 ; v1(3808.98,4710.43) V14.VCC@3933.86,4710.43 ; v1(3810,5110.43) V13.VCC@3933.86,5110.43 ; v1(3910,1478) 3910.43,1478.43 3910.43,1510 ; V8.VCC@3910.43,1541.14 3910.43,1510 ; v1(4290.43,1478.58) 4310.43,1498.58 V7.VCC@4310.43,1541.14 ; v1(4690.43,1478.58) 4710.43,1498.58 V6.VCC@4710.43,1541.14 ; v1(5090,1478.43) 5110.43,1498.87 V5.VCC@5110.43,1541.14 ; 1640,759.57 1657.57,759.57 1752,854 1752,1087.57
  Mid-Layer 1 w7: v1(488.5,4054.5) 508.5,4074.5 1524.5,4074.5 1525.5,4073.5 ; v1(759.57,4038.74) 789.83,4069 1530,4069 ; v1(1262.93,4073.5) 1525.5,4073.5 ; v1(1600,3999) 1530,4069 ; v1(1709,1625) 1755,1671 3626,1671 v1(3797,1500) ; v1(4290.43,1478.58) 4326.85,1515 4654.02,1515 v1(4690.43,1478.58) 4723.85,1512 5056.43,1512 v1(5090,1478.43) ; 1525.5,4073.5 1530,4069
  Mid-Layer 2 w7: v1(1675,1560) 1694.5,1540.5 1694.5,1188.5 v1(1752,1131) ; v1(3809,4250) 3900,4341 3900,4650 3839.57,4710.43 3828.98,4710.43 ; v1(3808.98,4710.43) 3828.98,4710.43 ; v1(3810,5110.43) 3810,4877.13 3842,4845.13 3842,4723.46 3828.98,4710.43
  Bottom Layer w7: v1(340,4010) 444,4010 v1(488.5,4054.5) ; BH3.18@1028.54,1987.5 1090.41,1987.5 ; v1(1102.91,2007.5) 1102.91,2000 1090.41,1987.5 ; v1(1600,3999) 1851,4250 v1(3809,4250) ; v1(1709,1625) 1346.5,1987.5 1090.41,1987.5 ; v1(3910,1478) 3964,1532 4237.02,1532 v1(4290.43,1478.58)
GND: BH2.18 BH2.19 BH2.20 BH2.21 BH2.22 BH3.19 BH3.20 BH3.21 BH4.20 BH4.21 C1.GND C2.GND C3.GND C4.GND OB1.GND OB2.GND OB3.GND OB4.GND OB5.GND OB6.GND OB7.GND OB8.GND OB9.GND OB10.GND OB11.GND OB12.GND OB13.GND OB14.GND OB15.GND OB16.GND S1.ADDR12 S1.ADDR13 S1.ADDR14 S1.ADDR15 S1.VSS S1.~BHE S1.~BLE S2.ADDR12 S2.ADDR13 S2.ADDR14 S2.ADDR15 S2.VSS S2.~BHE S2.~BLE S3.ADDR12 S3.ADDR13 S3.ADDR14 S3.ADDR15 S3.VSS S3.~BHE S3.~BLE S4.ADDR12 S4.ADDR13 S4.ADDR14 S4.ADDR15 S4.VSS S4.~BHE S4.~BLE S5.ADDR12 S5.ADDR13 S5.ADDR14 S5.ADDR15 S5.VSS S5.~BHE S5.~BLE S6.ADDR12 S6.ADDR13 S6.ADDR14 S6.ADDR15 S6.VSS S6.~BHE S6.~BLE S7.ADDR12 S7.ADDR13 S7.ADDR14 S7.ADDR15 S7.VSS S7.~BHE S7.~BLE S8.ADDR12 S8.ADDR13 S8.ADDR14 S8.ADDR15 S8.VSS S8.~BHE S8.~BLE TH2.17 TH2.18 TH2.19 TH2.20 TH2.21 TH2.22 TH2.23 TH2.24 TH3.17 TH3.18 TH3.19 TH3.20 TH3.21 TH3.22 TH3.23 TH3.24 TH4.17 TH4.18 TH4.19 TH4.20 TH4.21 TH4.22 TH4.23 TH4.24 TH5.17 TH5.18 TH5.19 TH5.20 TH5.21 TH5.22 TH5.23 TH5.24 TH6.17 TH6.18 TH6.19 TH6.20 TH6.21 TH6.22 TH6.23 TH6.24 TH7.17 TH7.18 TH7.19 TH7.20 TH7.21 TH7.22 TH7.23 TH7.24 TH8.17 TH8.18 TH8.19 TH8.20 TH8.21 TH8.22 TH8.23 TH8.24 V1.GND V2.GND V3.GND V4.GND V5.GND V6.GND V7.GND V8.GND V9.GND V10.GND V11.GND V12.GND V13.GND V14.GND V15.GND V16.GND | length 67289.1
  Top Layer w7: v1(159.43,4563.74) 159.43,4572.16 207.55,4620.28 ; v1(194,4058.32) 174.68,4039 ; TH5.20@221.46,1787.5 TH5.19@221.46,1887.5 TH5.18@221.46,1987.5 ; S5.~BHE@233.62,4620.28 207.55,4620.28 ; S5.~BLE@233.62,4651.77 207.55,4651.77 ; S5.VSS@233.62,4809.25 196,4805.25 196,4651.77 207.55,4651.77 ; S1.ADDR12@330.79,686.38 330.79,652.76 362.28,652.76 ; S2.ADDR12@330.79,1501.38 330.79,1535 362.28,1535 ; S1.ADDR13@362.28,686.38 362.28,652.76 ; S2.ADDR13@362.28,1501.38 362.28,1535 ; S1.ADDR15@425.28,686.38 425.28,720 ; v1(425.28,745) 425.28,720 ; v1(497.72,5152.72) 557.72,5092.72 652.76,5092.72 ; v1(498,5093) 509,5082 509,4852 520.25,4840.75 S5.VSS@686.38,4840.75 ; TH5.21@528.54,1787.5 TH5.22@528.54,1887.5 ; TH5.24@528.54,2087.5 TH5.23@528.54,1987.5 ; V10.GND@554.84,3933.86 554.84,4019 473.84,4025 459.84,4039 174.68,4039 ; v1(614,758) v1@614.25,757.75 ; S1.VSS@614.25,686.38 v1@614.25,757.75 ; v1(614.25,817.93) v1@614.25,757.75 ; S2.VSS@614.25,1501.38 614.25,1560 ; v1(627,5054) 651.28,5029.72 652.76,5029.72 ; S1.VSS@645.75,233.62 645.75,160 668.75,137 760,137 803.23,180.23 803.23,200 ; S2.VSS@645.75,1048.62 645.75,1075.79 642,1079.54 642,1143.43 v1(682.8,1184.23) ; S5.ADDR15@686.38,5029.72 652.76,5029.72 ; S5.ADDR12@686.38,5124.21 652.76,5124.21 652.76,5092.72 ; S2.~BLE@803.23,1048.62 803.23,1082.24 ; v1(803.23,1184.23) 803.23,1082.24 ; S1.~BHE@834.72,233.62 834.72,200 803.23,200 ; S2.~BHE@834.72,1048.62 834.72,1082.24 803.23,1082.24 ; v1(934.84,4038.74) 954.84,4018.74 V11.GND@954.84,3933.86 954.84,2452.16 1073,2334 1073,2134.5 1120,2087.5 TH6.17@1221.46,2087.5 TH6.18@1221.46,1987.5 TH6.19@1221.46,1887.5 TH6.20@1221.46,1787.5 ; S6.~BHE@1048.62,4620.28 1015,4620.28 1015,4651.77 S6.~BLE@1048.62,4651.77 1163.23,4651.77 1175,4640 1175,4535 v1(1195,4515) ; S6.VSS@1048.62,4809.25 1074.25,4809.25 1108,4843 v1(1176,4843) ; v1(1130,135.43) 1083.74,135.43 1049,170.17 1049,350.5 955.47,444.03 878,444.03 803.23,369.25 S1.~BLE@803.23,233.62 803.23,200 ; v1(1151.88,1355.43) 1128,1379.31 1128,1555.88 1115.5,1568.38 1115.5,1743 1160,1787.5 ; v1(1233,516) 1242.66,506.34 1431.5,506.34 ; V12.GND@1354.84,3933.86 v1(1354.84,3999) 1354.84,4028.84 1399,4073 1740.5,4073 1787.5,4120 TH7.20@1787.5,4253.54 TH7.19@1887.5,4253.54 ; S6.VSS@1501.38,4840.75 1475.75,4840.75 1470,4835 1418.5,4835 1378,4875.5 1378,5007.72 1400,5029.72 1467.76,5029.72 ; S6.ADDR15@1501.38,5029.72 1467.76,5029.72 ; S6.ADDR14@1501.38,5061.22 1467.76,5061.22 ; TH6.24@1528.54,2087.5 TH6.23@1528.54,1987.5 TH6.22@1528.54,1887.5 TH6.21@1528.54,1787.5 TH6.20@1221.46,1787.5 ; V2.GND@1541.14,554.84 1480,554.84 1456.16,531 ; V3.GND@1541.14,954.84 1509.63,954.84 1449,894.21 1449,666.61 1402.5,620.11 1402.5,531.93 1403.43,531 1456.16,531 ; V4.GND@1541.14,1354.84 1646.16,1354.84 v1(1666,1335) ; TH7.21@1787.5,3946.46 TH7.22@1887.5,3946.46 TH7.23@1987.5,3946.46 TH7.24@2087.5,3946.46 TH7.17@2087.5,4253.54 TH7.18@1987.5,4253.54 TH7.19@1887.5,4253.54 ; TH8.21@1787.5,4946.46 TH8.22@1887.5,4946.46 TH8.23@1987.5,4946.46 ; TH8.20@1787.5,5253.54 TH8.19@1887.5,5253.54 ; v1(2130,126) 2101.16,154.84 V1.GND@1541.14,154.84 1523,154.84 1494.16,126 1460,126 1448,138 1448,245 1429,264 1429,503.84 1431.5,506.34 ; TH3.17@3387.5,221.46 TH3.18@3487.5,221.46 TH3.19@3587.5,221.46 TH3.20@3687.5,221.46 3687.5,440 ; TH3.24@3387.5,528.54 TH3.23@3487.5,528.54 TH3.22@3587.5,528.54 TH3.21@3687.5,528.54 ; TH2.17@3387.5,1221.46 TH2.18@3487.5,1221.46 TH2.19@3587.5,1221.46 TH2.20@3687.5,1221.46 ; TH2.24@3387.5,1528.54 TH2.23@3487.5,1528.54 TH2.22@3587.5,1528.54 TH2.21@3687.5,1528.54 3687.5,1480 ; v1(3786,4535) 3805.84,4515.16 v1(3845,4515.16) V15.GND@3933.86,4515.16 ; v1(3809,5335.16) 3829,5315.16 V13.GND@3933.86,5315.16 ; v1(3848.98,4155.16) 3840,4155.16 3828.98,4144.14 3828.98,4135.16 3848.98,4115.16 V16.GND@3933.86,4115.16 ; v1(3848.98,4895.16) 3868.98,4915.16 V14.GND@3933.86,4915.16 ; TH4.24@3946.46,3387.5 TH4.23@3946.46,3487.5 TH4.22@3946.46,3587.5 TH4.21@3946.46,3687.5 TH4.20@4253.54,3687.5 ; S4.ADDR12@3973.62,330.79 4007.24,330.79 ; S4.ADDR13@3973.62,362.28 4007.24,362.28 ; S4.ADDR15@3973.62,425.28 4007.24,425.28 4007.24,393.78 ; S4.VSS@3973.62,614.25 3900,614.25 3866.5,580.75 3866.5,442.28 3915,393.78 ; v1(4115.16,1478) V8.GND@4115.16,1541.14 ; v1(4179,1018) 4224.65,1018 ; TH4.17@4253.54,3387.5 TH4.18@4253.54,3487.5 TH4.19@4253.54,3587.5 TH4.20@4253.54,3687.5 ; v1(4356,4996) 4503.55,5143.55 4549.51,5143.55 4620.28,5214.32 S7.~BHE@4620.28,5241.38 4620.28,5275 4651.77,5275 S7.~BLE@4651.77,5241.38 ; v1(4360.5,3687.5) TH4.20@4253.54,3687.5 ; S4.VSS@4426.38,645.75 4457,645.75 4469.75,633 4490,633 4494,629 4523,629 4534,640 4534,755.67 4486.45,803.23 4460,803.23 ; S4.~BLE@4426.38,803.23 4460,803.23 ; V7.GND@4515.16,1541.14 4515.16,1510.84 ; v1(4578,1027) 4578,1435 v1(4535,1478) 4515.16,1497.84 4515.16,1510.84 ; v1(4608.32,1466) 4560,1466 4515.16,1510.84 ; S8.~BHE@4620.28,4426.38 4620.28,4460 4651.77,4460 ; S8.~BLE@4651.77,4426.38 4651.77,4460 ; v1(4786.26,4498.74) 4809.25,4475.75 4809.25,4452 ; S3.ADDR12@4788.62,330.79 4822.24,330.79 4839.73,348.27 ; S3.ADDR14@4788.62,393.78 4822.24,393.78 ; S3.ADDR15@4788.62,425.28 4822.24,425.28 ; S3.VSS@4788.62,614.25 4829.25,614.25 v1(4848,633) ; v1(4789.25,5323) 4809.25,5303 S7.VSS@4809.25,5241.38 4809.25,5209.25 4826.26,5192.24 4826.26,5164.74 4839,5152 4867.72,5152 5029.72,4990 5029.72,4822.24 ; S8.VSS@4809.25,4426.38 4809.25,4452 ; S8.VSS@4840.75,3973.62 4840.75,3726.75 4880,3687.5 TH3.21@4946.46,3687.5 ; S7.VSS@4840.75,4788.62 4840.75,4760 4853.53,4747.22 5050,4747.22 5061.22,4758.44 ; v1(4863,325) 4839.73,348.27 ; v1(4901,4726) 5040,4726 5061.22,4747.22 5061.22,4758.44 ; V6.GND@4915.16,1541.14 4915.16,1498.58 v1(4935.16,1478.58) ; S8.ADDR15@5029.72,3973.62 5029.72,3940 5061.22,3940 ; S7.ADDR15@5029.72,4788.62 5029.72,4822.24 ; v1(5040.5,3687.5) 5000,3687.5 ; S8.ADDR13@5092.72,3973.62 5092.72,4007.24 ; S7.ADDR13@5092.72,4788.62 5092.72,4822.24 ; S8.ADDR12@5124.21,3973.62 5124.21,4007.24 5092.72,4007.24 ; S7.ADDR12@5124.21,4788.62 5124.21,4822.24 5092.72,4822.24 ; S3.VSS@5241.38,645.75 5170.25,645.75 5124.5,600 5124.5,385.82 4823.68,85 4240.5,85 4186.94,138.56 4186.94,215.85 4072,330.79 4007.24,330.79 ; S3.~BLE@5241.38,803.23 5275,803.23 ; S3.~BHE@5241.38,834.72 5275,834.72 5275,803.23 ; TH3.20@5253.54,3687.5 TH3.19@5253.54,3587.5 TH3.18@5253.54,3487.5 TH3.17@5253.54,3387.5 ; v1(5309.16,1478.16) 5315.16,1484.16 V5.GND@5315.16,1541.14 5315.16,1697.74 5376.42,1759 5376.42,3365.08 5354,3387.5 TH3.17@5253.54,3387.5 ; v1(5343,960.57) 5343,807.86 5338.37,803.23 5275,803.23 ; 174.68,4039 154.84,4019.16 V9.GND@154.84,3933.86 154.84,3842.84 71,3759 71,2136.5 120,2087.5 TH5.17@221.46,2087.5 TH5.18@221.46,1987.5 ; 207.55,4620.28 207.55,4651.77 ; TH5.18@221.46,1987.5 TH5.23@528.54,1987.5 ; 362.28,652.76 393.78,652.76 S1.ADDR14@393.78,686.38 393.78,720 425.28,720 ; 362.28,1535 393.78,1535 S2.ADDR14@393.78,1501.38 393.78,1467.76 425.28,1467.76 S2.ADDR15@425.28,1501.38 425.28,1560 474.28,1609 565.25,1609 614.25,1560 ; TH5.22@528.54,1887.5 587.5,1887.5 615.75,1859.25 615.75,1811.75 640,1787.5 660,1787.5 ; TH5.22@528.54,1887.5 TH5.23@528.54,1987.5 ; 614.25,1560 v1(614.25,1721.75) 614.25,1741.75 660,1787.5 ; 652.76,5029.72 652.76,5061.22 S5.ADDR14@686.38,5061.22 S5.ADDR13@686.38,5092.72 652.76,5092.72 ; 660,1787.5 1160,1787.5 ; 1160,1787.5 TH6.20@1221.46,1787.5 ; 1431.5,506.34 1456.16,531 ; 1467.76,5029.72 1467.76,5061.22 ; 1467.76,5061.22 1467.76,5092.72 S6.ADDR13@1501.38,5092.72 S6.ADDR12@1501.38,5124.21 1464,5124.21 1464,5181 1480,5197 1874.5,5197 1887.5,5210 TH8.19@1887.5,5253.54 ; TH7.19@1887.5,4253.54 1887.5,4311.5 2036,4460 2036,4856.42 1987.5,4904.92 TH8.23@1987.5,4946.46 ; TH8.19@1887.5,5253.54 TH8.18@1987.5,5253.54 TH8.17@2087.5,5253.54 TH8.24@2087.5,4946.46 TH8.23@1987.5,4946.46 ; 3687.5,440 3687.5,479.17 TH3.21@3687.5,528.54 ; 3687.5,440 3733.72,393.78 3915,393.78 ; TH3.21@3687.5,528.54 TH2.20@3687.5,1221.46 ; TH2.20@3687.5,1221.46 3687.5,1480 ; 3687.5,1480 3742.5,1425 3949,1425 3968,1444 4060.96,1444 4097.96,1407 4220,1407 4259,1446 4374,1446 4419,1401 4521,1401 4563,1359 4563,1058.27 4522.73,1018 4224.65,1018 ; 3915,393.78 S4.ADDR14@3973.62,393.78 4007.24,393.78 ; 4007.24,330.79 4007.24,362.28 ; 4007.24,362.28 4007.24,393.78 ; 4224.65,1018 4243,999.65 4243,920 4269.8,893.2 4269.8,847.34 4307.64,809.5 4346.78,809.5 4372,834.72 S4.~BHE@4426.38,834.72 4460,834.72 4460,803.23 ; 4651.77,4460 4651.77,4465 4614,4502.77 4614,4584.75 4640,4610.75 4650.5,4610.75 4809.25,4452 ; 4822.24,364.53 4822.24,365.09 ; 4822.24,364.53 4822.86,365.14 ; 4822.24,364.53 4820,362.28 S3.ADDR13@4788.62,362.28 4822.24,365.09 ; 4822.24,365.09 4822.24,393.78 ; 4822.24,365.09 4822.86,365.14 ; 4822.24,393.78 4822.24,405 ; 4822.24,405 4822.24,425.28 ; 4822.24,405 v1(4847,405) ; 4822.24,425.28 4826.72,425.28 v1(4847,405) ; 4822.86,365.14 4847,389.28 v1(4847,405) ; 4822.86,365.14 4839.73,348.27 ; TH3.21@4946.46,3687.5 5000,3687.5 ; TH3.21@4946.46,3687.5 TH3.22@4946.46,3587.5 TH3.23@4946.46,3487.5 TH3.24@4946.46,3387.5 TH3.17@5253.54,3387.5 ; 5000,3687.5 5061.22,3748.72 v1(5061.22,3767.5) 5061.22,3940 ; 5029.72,4822.24 5061.22,4822.24 ; 5061.22,3940 S8.ADDR14@5061.22,3973.62 5061.22,4007.24 5092.72,4007.24 ; 5061.22,4758.44 S7.ADDR14@5061.22,4788.62 5061.22,4822.24 ; 5061.22,4822.24 5092.72,4822.24
  Mid-Layer 1 w7: v1(614,758) 567,758 525,800 525,979 556,1010 1021.49,1010 1034.49,997 1034.49,981.97 v1(1081.02,935.43) ; v1(682.8,1184.23) v1(803.23,1184.23) ; v1(1233,516) 1408,341 1408,227 1446,189 1446,160 1469,137 v1(2130,126) 2184,180 3480,180 ; v1(4179,1018) 4223.54,1062.54 4223.54,1342.46 4182,1384 ; v1(4396,4525) 4422.26,4498.74 v1(4786.26,4498.74) ; v1(4535,1478) 4486.5,1429.5 4415.5,1429.5 ; v1(4789.25,5323) 4840.75,5374.5 4896.53,5374.5 5384,4887.03 5384,4031 v1(5040.5,3687.5) ; v1(5343,960.57) 5372.5,931.07 5372.5,514.5 5331.78,473.78 5213.48,473.78 5188.24,448.53 4945.03,448.53 4934.5,438 4880,438 v1(4847,405) 4712,270 4464.64,270 4369.36,365.28 4323.98,365.28 4282.26,407 4173,407 3946,180 3480,180 ; 3480,180 3616,316 3616,988 3747,1119 3747,1376 ; 3747,1376 3747,1379 3901,1533 4033,1533 4052,1514 ; 3747,1376 3885,1514 4052,1514 ; 4052,1514 4079.16,1514 v1(4115.16,1478) 4145.16,1448 4397,1448 4415.5,1429.5 ; 4052,1514 4182,1384 ; 4182,1384 4313,1384 4358.5,1429.5 4415.5,1429.5
  Mid-Layer 2 w7: v1(159.43,4563.74) 159.43,4393.57 194,4359.01 ; v1(194,4058.32) 194,4359.01 ; v1(497.72,5152.72) 478.56,5133.56 478.56,5016.44 ; v1(498,5093) 480,5075 480,5015 ; 515,4766 480,4801 480,5015 ; v1(536,4524) 515,4545 515,4765.97 478.56,4802.41 478.56,5016.44 ; v1(614.25,817.93) 520,817.93 494.25,843.69 494.25,995.68 v1(682.8,1184.23) ; v1(1081.02,935.43) 1050,966.45 ; v1(1121,1263) 1050,1192 1050,966.45 ; v1(1130,135.43) 1253,258.43 1253,403.93 v1(1233,423.93) ; v1(1176,4843) 1110,4843 1098,4831 1098,4612 v1(1195,4515) ; v1(1233,516) 1233,617 1179,671 1179,712.4 1169,722.4 1169,816.43 1050,935.43 1050,966.45 ; v1(3786,4535) 3779,4542 3779,4863 3792,4876 3792,5080 3780,5092 3780,5306.16 v1(3809,5335.16) 3809,5173 3848.98,5133.02 v1(3848.98,4895.16) ; v1(3845,4515.16) 3845,4359 3779,4293 3779,4205.14 3828.98,4155.16 v1(3848.98,4155.16) ; v1(4179,1018) 4179,972 v1(4197,954) ; v1(4200,4158) 4296,4158 4311,4173 ; v1(4311,4117.57) 4311,4173 ; v1(4396.3,4916.57) 4366,4886.27 4366,4555 v1(4396,4525) 4396,4258 4311,4173 ; v1(4847,405) 4819,433 4819,604 v1(4848,633) ; 194,4359.01 194,5040 239.5,5085.5 409.5,5085.5 478.56,5016.44 ; 478.56,5016.44 480,5015
  Bottom Layer w7: OB9.GND@159.43,4458.86 v1(159.43,4563.74) ; v1(425.28,745) 458.21,777.93 C1.GND@491.14,777.93 574.25,777.93 v1(614.25,817.93) ; v1(536,4524) 556.43,4503.57 OB10.GND@556.43,4458.86 ; v1(614.25,1721.75) 680,1787.5 BH3.21@721.46,1787.5 BH3.20@1028.54,1787.5 BH3.19@1028.54,1887.5 ; v1(627,5054) 719,4962 765.93,4962 767.93,4960 C3.GND@767.93,4928.86 ; OB11.GND@954.43,4458.86 954.43,4420 911,4376.57 911,4312 960,4263 960,4219 ; OB1.GND@1016.14,155.43 1070,155.43 1090,135.43 v1(1130,135.43) ; OB2.GND@1016.14,555.43 1058.88,555.43 1098.31,516 ; OB3.GND@1016.14,955.43 1101.02,955.43 1121.02,935.43 v1(1081.02,935.43) ; OB4.GND@1016.14,1355.43 1048.57,1355.43 ; v1(1151.88,1355.43) 1121,1355.43 ; v1(1195,4515) 1214,4496 1214,4360 1171,4317 1094.54,4317 1094,4316.46 1094,4257.43 1079.5,4242.93 1079.5,4213.5 1120,4173 ; v1(1233,423.93) 1190.38,423.93 1098.31,516 ; v1(1233,516) 1098.31,516 ; OB12.GND@1353.43,4458.86 1353.43,4350.57 1446,4258 1601,4258 ; v1(1354.84,3999) 1270,3999 1200,4069 965.1,4069 v1(934.84,4038.74) 934.84,4163.84 960,4189 960,4219 ; v1(1666,1335) 1656,1345 1431,1345 1397,1311 ; BH4.21@1787.5,4753.54 BH4.20@1787.5,4446.46 1787.5,4397 ; v1(3848.98,4155.16) 3862.82,4169 4160,4169 4200,4129 ; OB8.GND@4114.57,1016.14 4114.57,979.43 4171.57,979.43 v1(4197,954) ; v1(4200,4158) 4200,4129 ; v1(4311,4117.57) OB14.GND@4458.86,4117.57 ; v1(4356,4996) 4356,4956.86 v1(4396.3,4916.57) OB16.GND@4458.86,4916.57 ; v1(4396,4525) 4420.43,4500.57 OB13.GND@4458.86,4500.57 ; BH2.18@4446.46,3487.5 BH2.19@4446.46,3587.5 BH2.20@4446.46,3687.5 ; OB15.GND@4458.86,5314.57 4463,5314.57 4557.43,5409 4703.25,5409 v1(4789.25,5323) ; OB7.GND@4514.57,1016.14 4514.57,987 4538,987 v1(4578,1027) ; v1(4608.32,1466) 4628.32,1446 4967.74,1446 ; C2.GND@4697.07,491.14 4697.07,473 4845.07,325 v1(4863,325) ; BH2.22@4753.54,3587.5 BH2.21@4753.54,3687.5 ; v1(4901,4726) 4921,4726 4949.93,4697.07 C4.GND@4983.86,4697.07 ; OB6.GND@4915.57,1016.14 4915.57,1048 4979,1048 5121,1190 5229,1190 5249.5,1169.5 5310,1169.5 5330,1189.5 5360,1189.5 5380.2,1169.3 5380.2,1041.7 5369.5,1031 5307.57,1031 OB5.GND@5307.57,1016.14 5307.57,973 5320,960.57 v1(5343,960.57) ; v1(4935.16,1478.58) 4967.74,1446 ; v1(5061.22,3767.5) 4981.22,3687.5 BH2.21@4753.54,3687.5 ; v1(5309.16,1478.16) 5277,1446 4967.74,1446 ; 960,4219 1000,4173 1120,4173 ; 1048.57,1355.43 1121,1355.43 ; 1048.57,1355.43 1121,1283 v1(1121,1263) 1143,1285 1371,1285 1397,1311 ; 1120,4173 1572,4173 ; 1121,1355.43 1165.43,1311 1397,1311 ; 1572,4173 1720.5,4173 1787.5,4240 1787.5,4397 ; 1572,4173 1609,4210 1609,4250 1601,4258 ; 1601,4258 1648.5,4258 1787.5,4397 ; 4200,4129 4200,3727.5 4240,3687.5 v1(4360.5,3687.5) BH2.20@4446.46,3687.5 ; BH2.20@4446.46,3687.5 4704.17,3687.5 BH2.21@4753.54,3687.5
INSIDE_B0: TH8.40 V14.IVCC0 ZIF.1 | length 4795.3
  Top Layer w7: ZIF.1@2737.5,3237.5 2737.5,3237 2722,3237 2722,5000 2773,5051 2800,5051 2832,5019 2832,4709 2758,4635 2758,4402 2818,4342 2934,4342 2954,4362 3061,4362 3152,4271 3152,4210 3163,4199 3517,4199 3538,4220 3538,4390 3582,4434 3582,4630.5 3687.5,4736 v1@3687.5,4872.5 ; TH8.40@3687.5,4946.46 v1@3687.5,4872.5 ; v1(3688,4872) v1@3687.5,4872.5 ; V14.IVCC0@3933.86,4684.84 3999.16,4684.84 v1(4019,4665)
  Mid-Layer 1 w7: v1(3688,4872) 3812,4872 v1(4019,4665)
INSIDE_B1: TH8.39 V14.IVCC1 ZIF.2 | length 5159.8
  Top Layer w7: v1(3496.17,5020.83) 3566.67,5020.83 3587.5,4995.83 ; TH8.39@3587.5,4946.46 3587.5,4995.83 ; v1(3607.5,5020.83) 3597.5,5030.83 3587.5,5020.83 3587.5,4995.83 ; V14.IVCC1@3933.86,4736.02 v1(3996.98,4736.02)
  Mid-Layer 2 w7: ZIF.2@2637.5,3237.5 2637.5,3458.5 2954,3775 2954,4840 2996,4882 3117,4882 3136,4863 3136,4312 3160,4288 3190,4288 3216.5,4314.5 3216.5,4474.5 3296,4554 3296,5011 3336,5051 3466,5051 v1(3496.17,5020.83) ; v1(3607.5,5020.83) 3607.5,5364.5 3640,5397 3880,5397 3924,5353 3924,4809 v1(3996.98,4736.02)
INSIDE_B2: TH8.38 V14.IVCC2 ZIF.3 | length 3436.3
  Top Layer w7: v1(3416,5088) 3417,5087 3417,4996 3420,4993 3487.5,4993 TH8.38@3487.5,4946.46 3487.5,4872.5 v1(3488,4872) ; v1(3871,4742) 3890.61,4761.61 V14.IVCC2@3933.86,4761.61
  Mid-Layer 2 w7: ZIF.3@2537.5,3237.5 2537.5,4654.46 2790.04,4907 3152,4907 3217,4842 3269,4842 3278,4851 3278,5046 3320,5088 v1(3416,5088)
  Bottom Layer w7: v1(3488,4872) 3503.5,4856.5 3620,4856.5 3662.5,4814 3751,4814 3823,4742 v1(3871,4742)
INSIDE_B3: TH8.37 V14.IVCC3 ZIF.4 | length 4138.1
  Top Layer w7: v1(3387.5,5020.83) TH8.37@3387.5,4946.46 3387.5,4903.5 3449,4842 3580,4842 3638,4900 3638,4977.33 3660,4999.33 3720.69,4999.33 3728.69,4991.33 3728.69,4840 3784.69,4784 3834.3,4784 3837.5,4787.2 V14.IVCC3@3933.86,4787.2
  Mid-Layer 2 w7: ZIF.4@2437.5,3237.5 2393,3193 2393,2921 2421,2893 2859,2893 2882,2916 2882,3324 3236.5,3678.5 3236.5,4460.26 3320,4543.76 3320,4953.33 v1(3387.5,5020.83)
INSIDE_B4: TH8.36 V14.IVCC4 ZIF.5 | length 3570.5
  Top Layer w7: v1(3247.5,4872.09) 3267.5,4872.09 3287.5,4892.09 TH8.36@3287.5,4946.46 ; v1(3809,4813) 3809.2,4812.8 V14.IVCC4@3933.86,4812.8
  Mid-Layer 2 w7: ZIF.5@2337.5,3237.5 2337.5,3440.5 2251,3527 2251,3923 2318,3990 2318,4773 2300,4791 2300,4843 2362,4905 2574,4905 2637,4842 2701,4842 2784,4925 3194.59,4925 v1(3247.5,4872.09)
  Bottom Layer w7: v1(3247.5,4872.09) 3277.41,4902 3720,4902 v1(3809,4813)
INSIDE_B5: TH8.35 V14.IVCC5 ZIF.6 | length 4161.8
  Top Layer w7: v1(3187,5087) 3187.5,5086.5 TH8.35@3187.5,4946.46 ; V14.IVCC5@3933.86,4838.39 v1(3997,4838.39)
  Mid-Layer 2 w7: ZIF.6@2237.5,3237.5 2216,3259 2216,3876 2200,3892 2200,4300 2216,4316 2216,4897 2298,4979 3079,4979 v1(3187,5087)
  Bottom Layer w7: v1(3187,5087) 3314.5,5087 3442.5,5215 3771,5215 3878.5,5107.5 4020,5107.5 4041,5086.5 4041,4882.39 v1(3997,4838.39)
INSIDE_B6: TH8.34 V14.IVCC6 ZIF.7 | length 2869.9
  Top Layer w7: v1(3067.5,4852.09) 3067.5,4872.09 3087.5,4892.09 TH8.34@3087.5,4946.46 ; v1(3762,4903) 3816,4849 3879.5,4849 3894.48,4863.98 V14.IVCC6@3933.86,4863.98
  Mid-Layer 1 w7: v1(3067.5,4852.09) 3118.41,4903 v1(3762,4903)
  Mid-Layer 2 w7: ZIF.7@2737.5,3137.5 2793,3193 2793,3566 3047.5,3820.5 3047.5,4832.09 v1(3067.5,4852.09)
INSIDE_B7: TH8.33 V14.IVCC7 ZIF.8 | length 4320.2
  Top Layer w7: ZIF.8@2637.5,3137.5 2681,3181 2681,3711 2553,3839 2553,4993.5 2539.5,5007 2539.5,5292.5 2554,5307 2927,5307 2953,5281 ; TH8.33@2987.5,4946.46 2987.5,5107.5 2953,5142 2953,5281 ; V14.IVCC7@3933.86,4889.57 3887.04,4889.57 3864.14,4866.66 3833.82,4866.66 3820,4880.48 3820,4934.49 3637.49,5117 3275,5117 3257,5135 3257,5201 3221,5237 3221,5307 2954,5307 2953,5306 2953,5281
INSIDE_B8: TH8.32 V13.IVCC0 ZIF.9 | length 3251
  Top Layer w7: v1(2887.5,4852.09) TH8.32@2887.5,4946.46 ; V13.IVCC0@3933.86,5084.84 3991.16,5084.84 v1(4011,5065)
  Mid-Layer 2 w7: ZIF.9@2537.5,3137.5 2581,3181 2581,3644 2717,3780 2717,4681.59 v1(2887.5,4852.09)
  Bottom Layer w7: v1(2887.5,4852.09) 2959.41,4924 3560,4924 3617.93,4981.93 3927.93,4981.93 v1(4011,5065)